# Altium PCB TD3_TP2_Placa-de-desarrollo.PcbDoc
Units mm, origin at the board's own origin, x right, y up, seen from the top; angles counter-clockwise.
Board outline 85 x 80 mm, 2 copper layers (Top Layer, Bottom Layer); 67 components, 68 nets, 231 pads, 16 vias.
Unrouted connection lines stored in the file: 1.
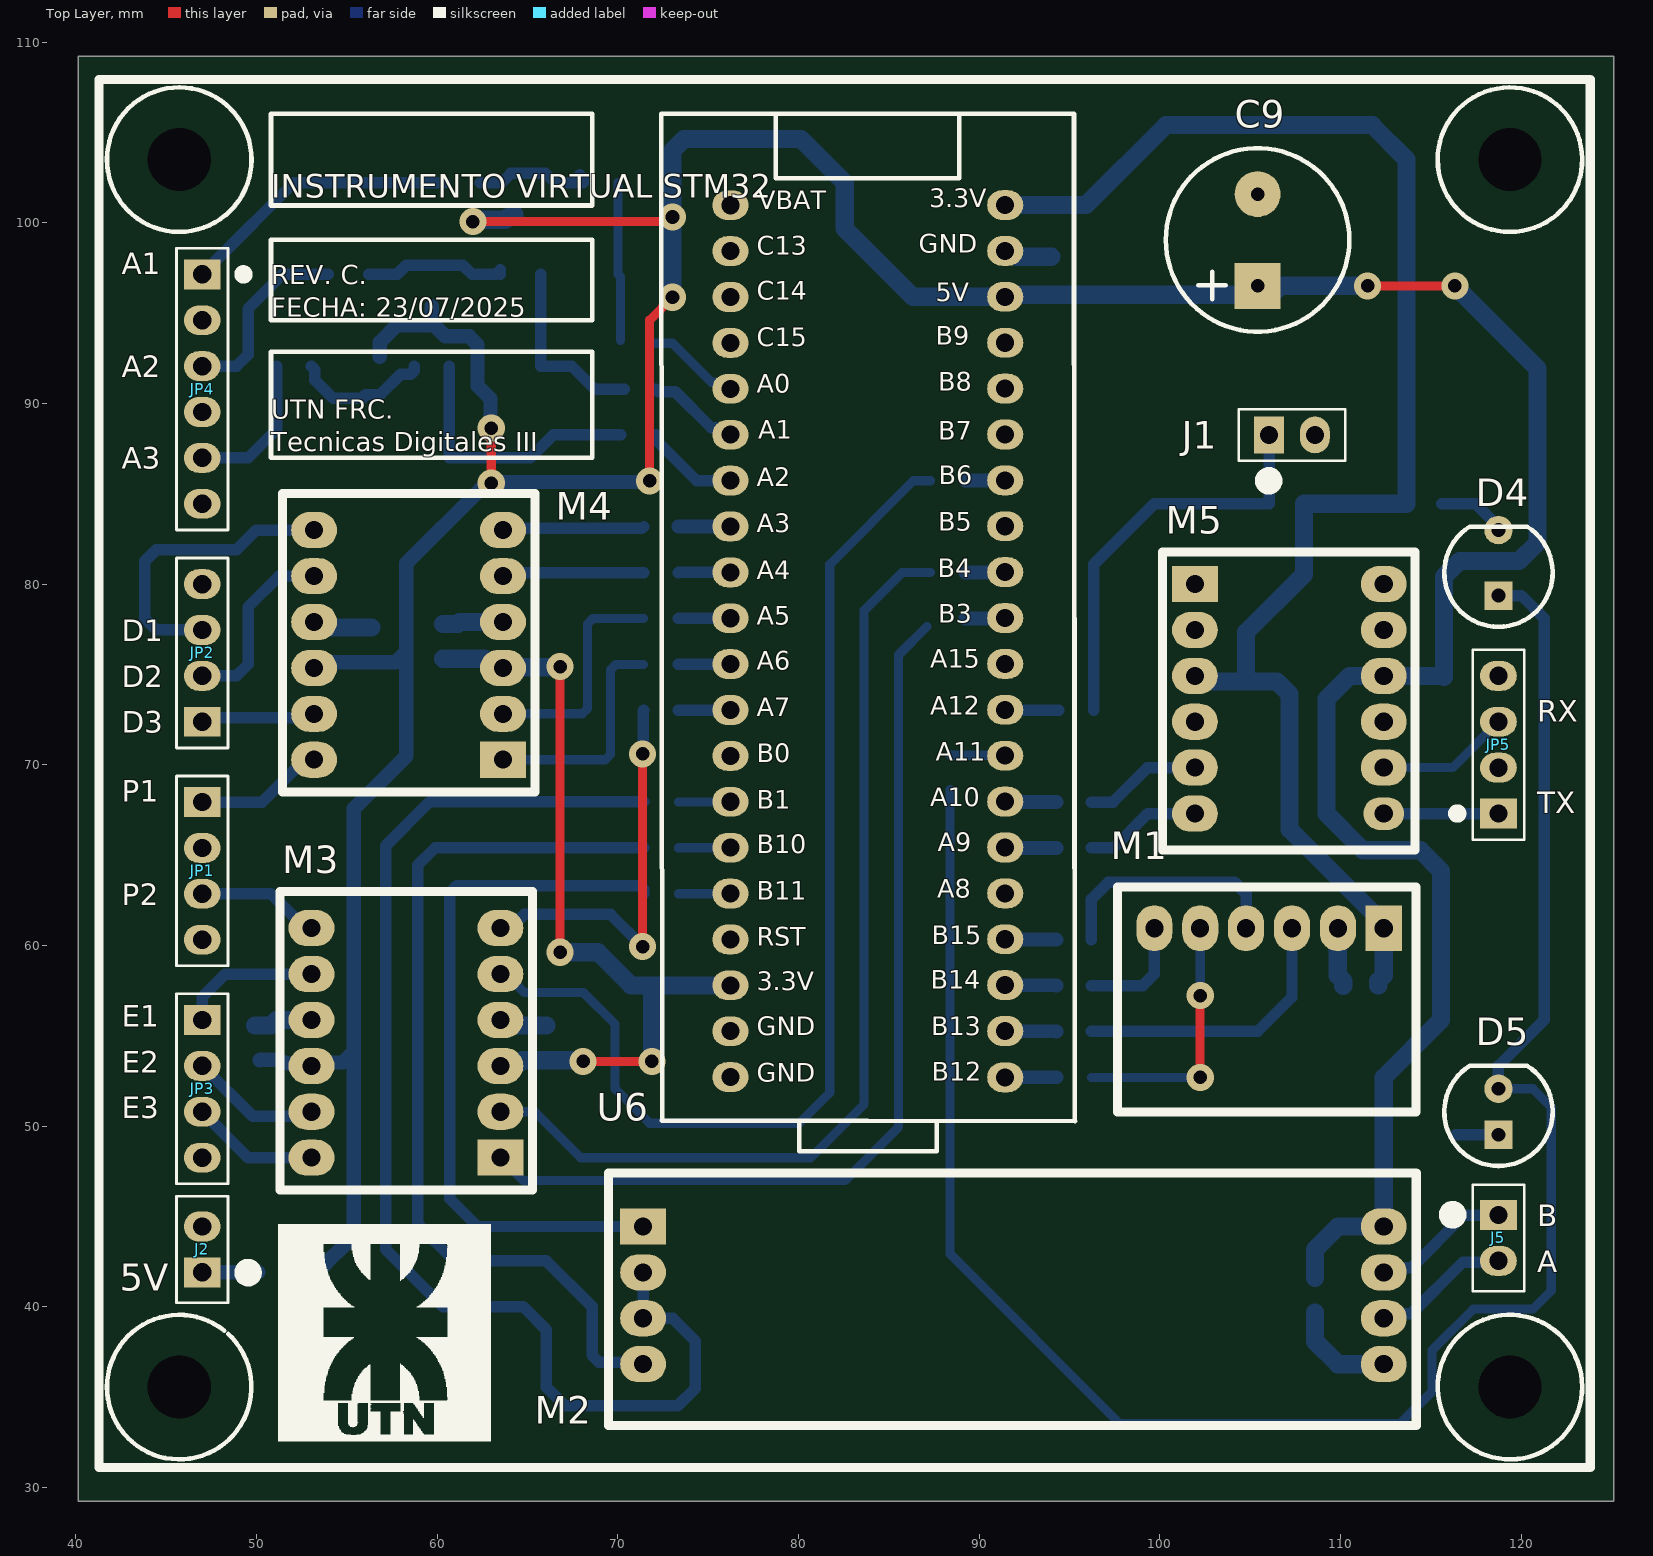
[diagram p0: Top Layer view]
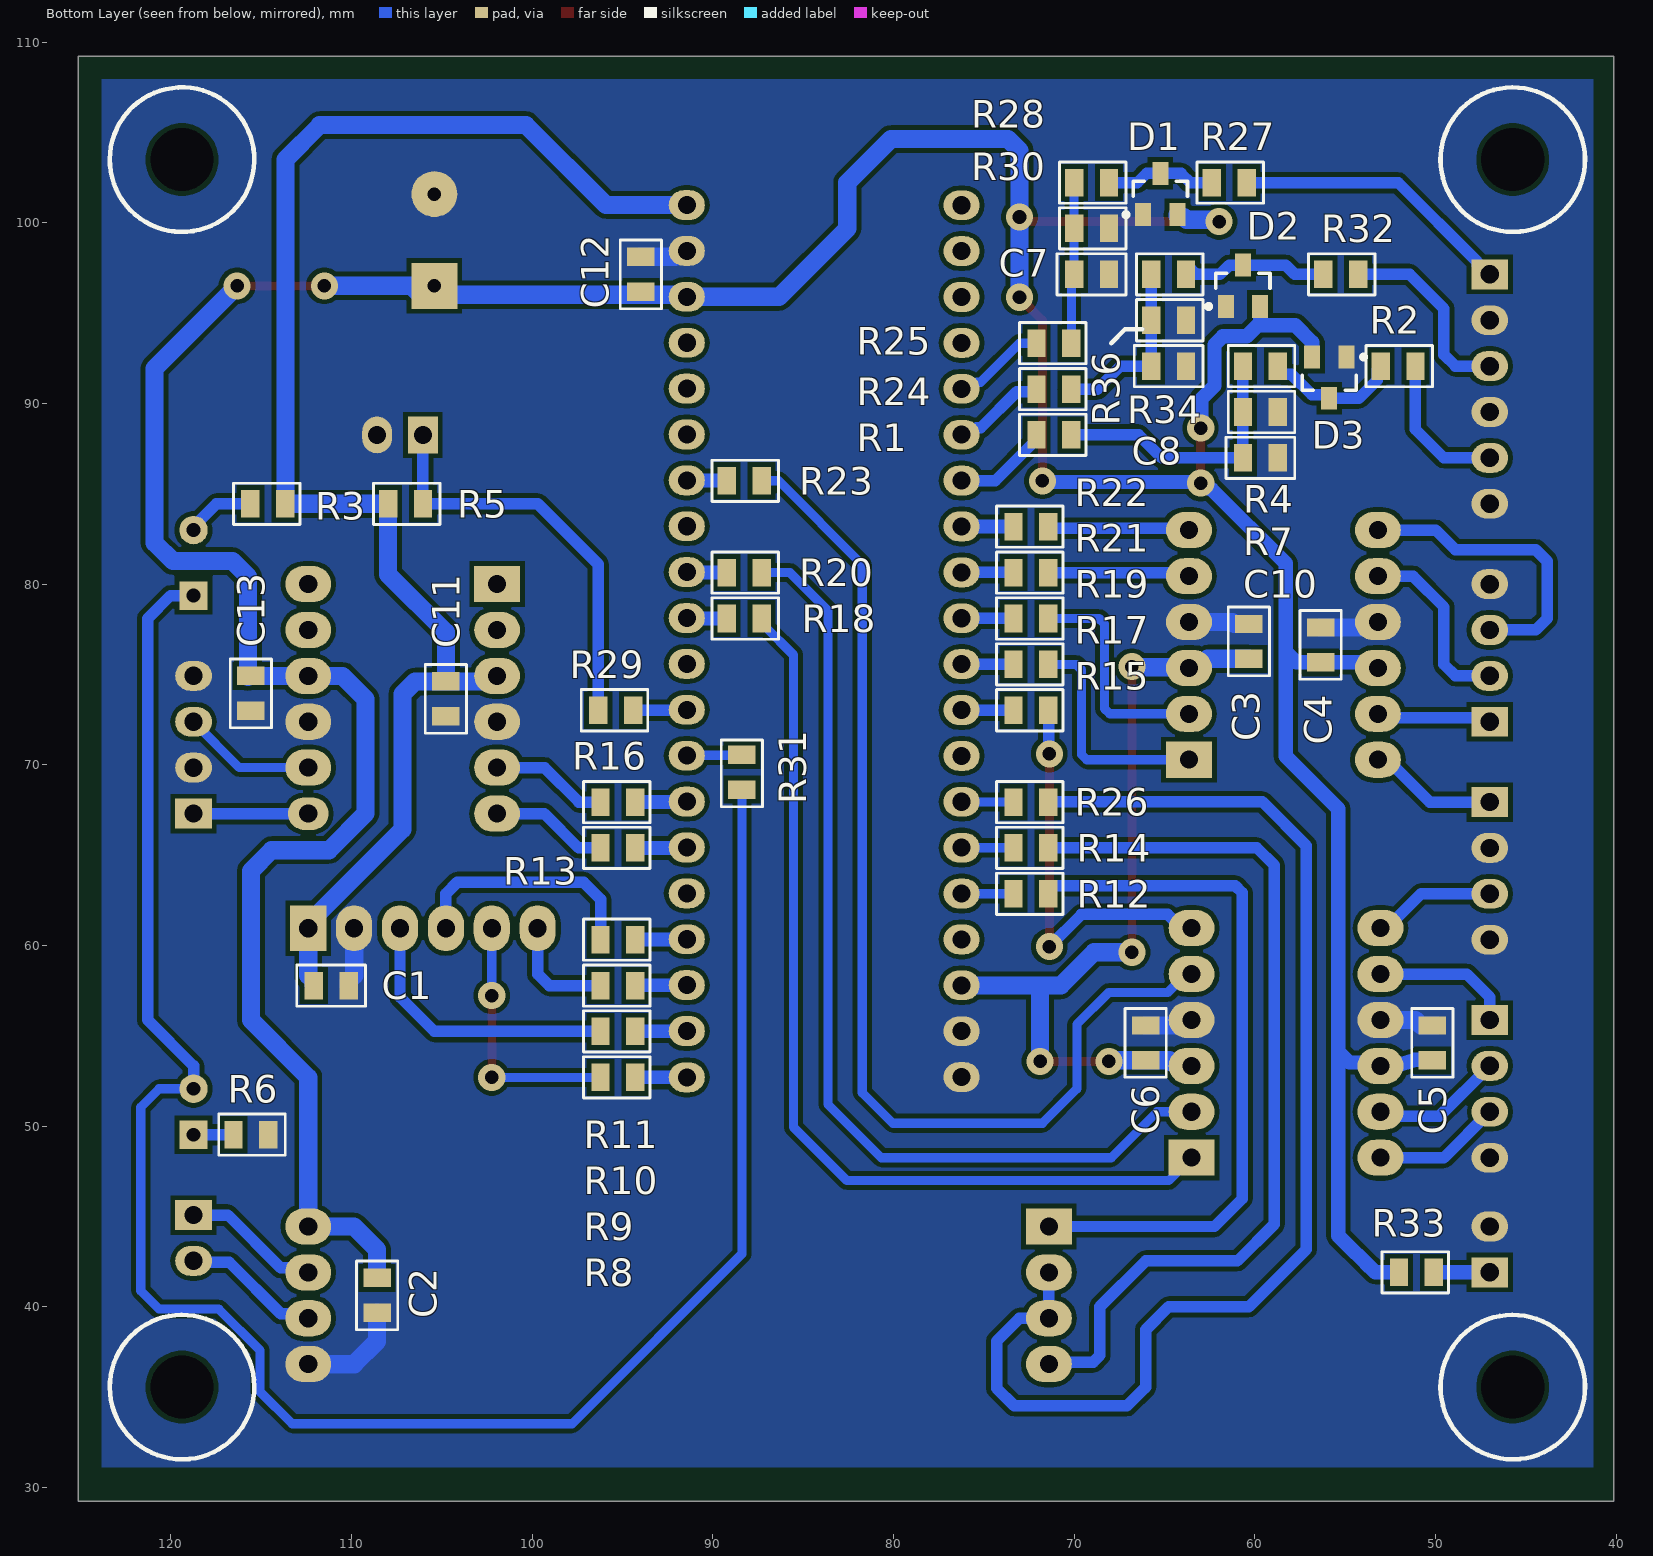
[diagram p1: Bottom Layer view, seen from below]
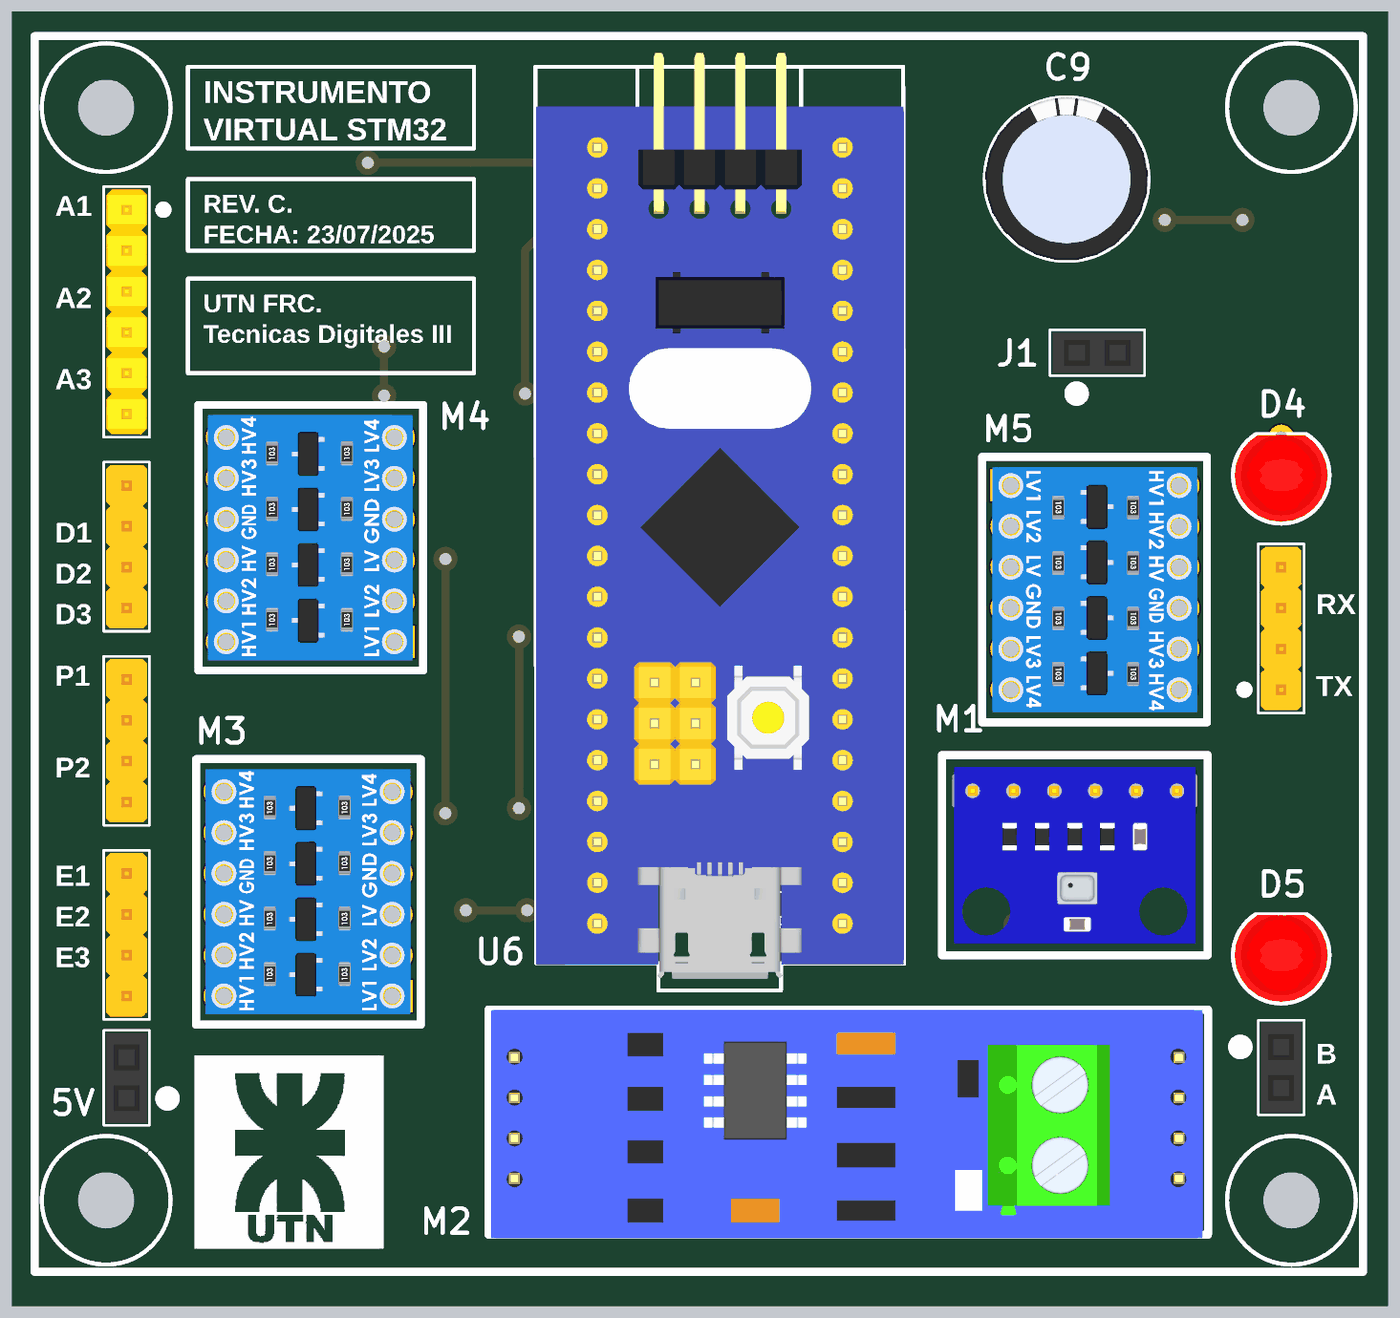
[diagram p2: 3D render of the assembled board from above, using the file's embedded part models]
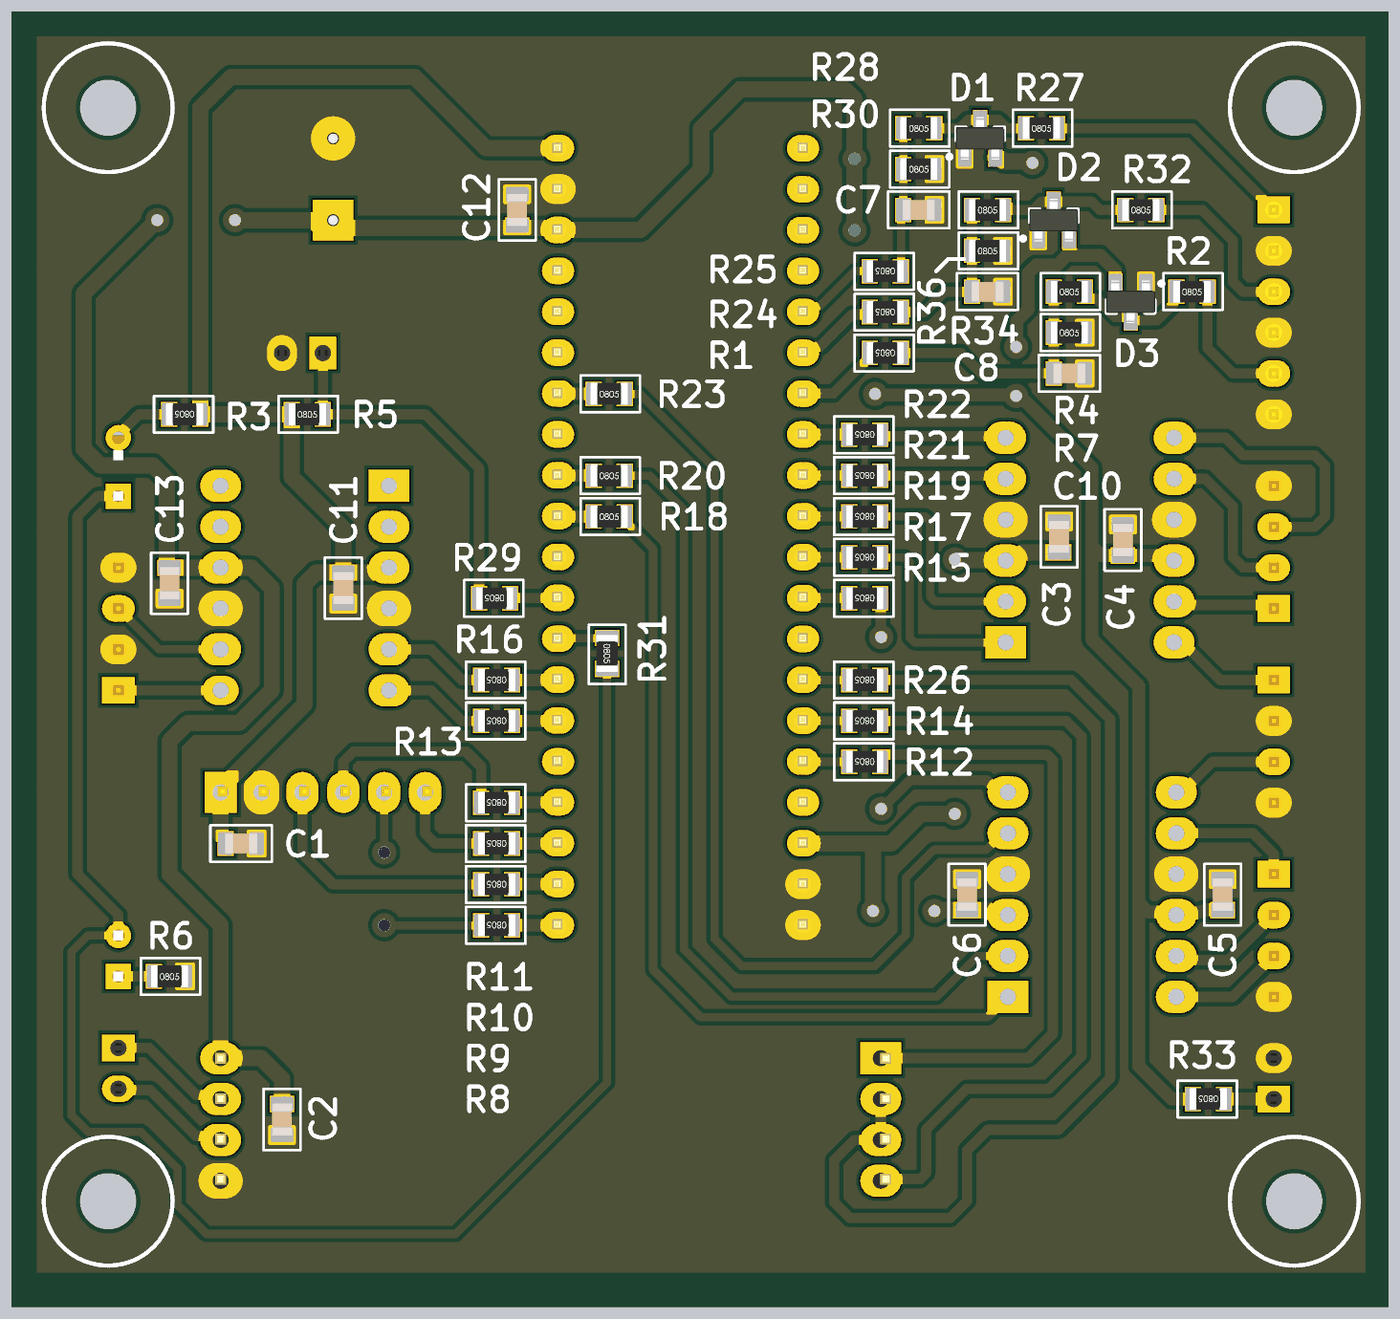
[diagram p3: 3D render of the assembled board from below, using the file's embedded part models]

## Layer stack, top to bottom
Top Solder: solder mask 0.0102, Solder Resist, Dk 3.5
Top Layer: signal copper 0.0356
Dielectric 1: dielectric 0.32, FR-4, Dk 4.8
Bottom Layer: signal copper 0.0356
Bottom Solder: solder mask 0.0102, Solder Resist, Dk 3.5

## Board outline
40.128,29.23 40.128,109.23 125.128,109.23 125.128,29.23

## Design rules (kind name [scope] priority, off if disabled: settings)
Clearance [All] p1: gap=0.254 ignorepadtopadclearanceinfootprint=FALSE
HoleSize [All] p1: absolutevalues=TRUE maxlimit=4.064 minlimit=0.025 maxpercent=80.000 minpercent=20.000
MinimumSolderMaskSliver [All] p1: minsoldermaskwidth=0.127
PolygonConnect [All] p1: connectstyle=Direct reliefconductorwidth=0.254 reliefentries=4 polygonreliefangle="90 Angle" airgapwidth=0.254
RoutingVias [All] p1: holewidth=0.711 width=1.27 viastyle="Through Hole" minholewidth=0.711 minwidth=1.27 maxholewidth=0.711 maxwidth=1.27
SilkToSilkClearance [All] p1: silktosilkclearance=0
SilkToSolderMaskClearance [IsPad] p1: minsilkscreentomaskgap=0.203 clearancetoexposedcopper=TRUE
SolderMaskExpansion [All] p1: expansion=0.102 istentingtop=FALSE
Width [All] p1: maxlimit=2.54 minlimit=0.254 preferedwidth=0.635
26 further rules are at their usual default settings.

## Components (designator, comment, footprint, x,y, rotation, side; value= is the part's Value field where it differs from the comment)
C1 "Cap No Pol" C_0805_RFW 111.125,57.785 r180 bottom
C2 "Cap No Pol" C_0805_RFW 108.585,40.64 r270 bottom
C3 "Cap No Pol" C_0805_RFW 60.325,76.835 r270 bottom
C4 "Cap No Pol" C_0805_RFW 56.359,76.645 r90 bottom
C5 "Cap No Pol" C_0805_RFW 50.165,54.61 r90 bottom
C6 "Cap No Pol" C_0805_RFW 66.04,54.61 r90 bottom
C7 "330pF" C_0805_RFW 69.037,97.155 r0 bottom
C8 "330pF" C_0805_RFW 64.77,92.075 r0 bottom
C9 "Cap Pol Al" CAP_ELECTR_V_10x12 105.41,99.06 r90 top
C10 "330pF" C_0805_RFW 59.69,86.995 r0 bottom
C11 "Cap No Pol" C_0805_RFW 104.775,73.66 r90 bottom
C12 "Cap No Pol" C_0805_RFW 93.98,97.155 r90 bottom
C13 "Cap No Pol" C_0805_RFW 115.57,73.965 r270 bottom
D1 "BAV199" SOT_23_3_1_RFW 65.227,101.6 r90 bottom
D2 "BAV199" SOT_23_3_1_RFW 60.655,96.52 r90 bottom
D3 "BAV199" SOT_23_3_1_RFW 55.88,91.44 r270 bottom
D4 "LED" LED_5mm#1 118.745,79.375 r90 top
D5 "LED" LED_5mm#2 118.745,49.53 r90 top
J1 "UART-B" HEADER_2_FEMALE_2.54 107.315,88.265 r0 top
J2 "5V" HEADER_2_FEMALE_2.54 46.99,43.18 r90 top
J5 "UART-B" HEADER_2_FEMALE_2.54 118.745,43.815 r270 top
JP1 "HEADER PART" PIN_1X4_MACHO_2.54 46.99,64.135 r270 top
JP2 "HEADER PART" PIN_1X4_MACHO_2.54 46.99,76.2 r90 top
JP3 "HEADER PART" PIN_1X4_MACHO_2.54 46.99,52.07 r270 top
JP4 "HEADER PART" PIN_1X6_MACHO_2.54 46.99,90.805 r270 top
JP5 "HEADER PART" PIN_1X4_MACHO_2.54 118.745,71.12 r90 top
M1 "BMP280_Sensor presión" BMP280 112.395,60.96 r270 top
M2 "ModBus_TTL_Converter" TTL_RS485_CONVERTER 71.395,44.45 r0 top
M3 "Level Translator" Level_Translator_FET#1 64.643,47.117 r90 top
M4 "Level Translator" Level_Translator_FET#1 64.784,69.145 r90 top
M5 "Level Translator" Level_Translator_FET#2 100.795,81.153 r270 top
R1 "100R" R_0805_RFW 71.12,88.265 r0 bottom
R2 "10k" R_0805_RFW 52.07,92.075 r180 bottom
R3 "100R0" R_0805_RFW 114.63,84.455 r0 bottom
R4 "100k" R_0805_RFW 59.69,92.075 r180 bottom
R5 "10k" R_0805_RFW 107.01,84.455 r180 bottom
R6 "100R0" R_0805_RFW 115.57,49.53 r180 bottom
R7 "15k" R_0805_RFW 59.69,89.535 r180 bottom
R8 "100R" R_0805_RFW 95.25,52.705 r0 bottom
R9 "100R" R_0805_RFW 95.25,55.245 r0 bottom
R10 "100R" R_0805_RFW 95.25,57.785 r0 bottom
R11 "100R" R_0805_RFW 95.25,60.325 r0 bottom
R12 "100R" R_0805_RFW 72.39,62.865 r0 bottom
R13 "100R" R_0805_RFW 95.25,65.405 r0 bottom
R14 "100R" R_0805_RFW 72.39,65.405 r0 bottom
R15 "100R" R_0805_RFW 72.39,73.025 r0 bottom
R16 "100R" R_0805_RFW 95.25,67.945 r0 bottom
R17 "100R" R_0805_RFW 72.39,75.565 r0 bottom
R18 "100R" R_0805_RFW 88.265,78.105 r180 bottom
R19 "100R" R_0805_RFW 72.39,78.105 r0 bottom
R20 "100R" R_0805_RFW 88.265,80.645 r180 bottom
R21 "100R" R_0805_RFW 72.39,80.645 r0 bottom
R22 "100R" R_0805_RFW 72.39,83.185 r0 bottom
R23 "100R" R_0805_RFW 88.265,85.725 r180 bottom
R24 "100R" R_0805_RFW 71.12,90.805 r0 bottom
R25 "100R" R_0805_RFW 71.12,93.345 r0 bottom
R26 "100R" R_0805_RFW 72.39,67.945 r0 bottom
R27 "10k" R_0805_RFW 61.417,102.235 r180 bottom
R28 "100k" R_0805_RFW 69.037,102.235 r180 bottom
R29 "100R" R_0805_RFW 95.377,73.025 r0 bottom
R30 "15k" R_0805_RFW 69.037,99.695 r180 bottom
R31 "100R" R_0805_RFW 88.392,69.596 r270 bottom
R32 "10k" R_0805_RFW 55.245,97.155 r180 bottom
R33 "100R" R_0805_RFW 51.054,41.91 r0 bottom
R34 "100k" R_0805_RFW 64.77,97.155 r180 bottom
R36 "15k" R_0805_RFW 64.77,94.615 r180 bottom
U6 "BluePill_STM32F103C8TX" BluePill_STM32F103CTX 91.44,52.705 r0 top

## Footprints (in the part's own frame and the unit in brackets; to place one, negate y for a bottom-side part, rotate by r counter-clockwise, add the part's x,y. Pads: shape width x height; smd on the part's side, far side on the other; paste and mask are expansions set on the pad)
BluePill_STM32F103CTX [mm]
  oval 2x1.651 hole 1: 1(0,0) 2(0,2.565) 3(0,5.105) 4(0,7.645) 5(0,10.185) 6(0,12.725) 7(0,15.265) 8(0,17.805) 9(0,20.345) 10(0,22.885) 11(0,25.425) 12(0,27.965) 13(0,30.505) 14(0,33.045) 15(0,35.585) 16(0,38.125) 17(0,40.665) 18(0,43.205) 19(0,45.745) 20(0,48.285) 21(-15.215,48.275) 22(-15.215,45.735) 23(-15.215,43.195) 24(-15.215,40.655) 25(-15.215,38.115) 26(-15.215,35.575) 27(-15.215,33.035) 28(-15.215,30.495) 29(-15.215,27.955) 30(-15.215,25.415) 31(-15.215,22.875) 32(-15.215,20.335) 33(-15.215,17.795) 34(-15.215,15.255) 35(-15.215,12.715) 36(-15.215,10.175) 37(-15.215,7.635) 38(-15.215,5.095) 39(-15.215,2.555) 40(-15.215,0.015)
  silkscreen extent -19.05,-4.09 3.87,53.34, body extent -19,-3.37 3.86,54.19, height 12.31
BMP280 [mm] "Sensor de presión y temperatura BMP280"
  rect 2.54x2 hole 1: 1(0,0)
  oval 2.54x2 hole 1: 2(0,-2.54) 3(0,-5.08) 4(0,-7.62) 5(0,-10.16) 6(0,-12.7)
  silkscreen extent -2.29,-14.73 10.16,1.78, body extent -1.56,-14.1 9.44,1.14, height 6.27
C_0805_RFW [mil] "CAPACITOR SMD 0805 - ALTURA 0.9mm"
  rect 40x60 smd paste-50: 1(-38,0) 2(38,0)
  silkscreen extent -75,-45 75,45, body extent -39,-25 39,25, height 24
CAP_ELECTR_V_10x12 [mm] "CAPACITOR ELECTROLITICO 10x12mm PITCH 200mils - VERTICAL"
  rect 2.54x2.54 hole 0.75: 1(-2.54,0)
  round 2.54 hole 0.75: 2(2.54,0)
  silkscreen extent -5.08,-5.08 5.08,5.08, body extent -5.08,-5.08 5.08,5.08, height 13.11
HEADER_2_FEMALE_2.54 [mil] "HEADER 2 PINES HEMBRA - PITCH 2.54mm - ALTURA 8.5mm"
  rect 65x80 hole 40: 1(-50,0)
  oval 65x80 hole 40: 2(50,0)
  silkscreen extent -116,-115 116,56, body extent -110,-50 110,50, height 335
LED_5mm#1 [mil] "LED 5mm - ROJO"
  round 62 hole 30: A(142.72,0)
  rect 62x62 hole 30: K(0,0)
  silkscreen extent -68,-118 150,118, body extent -64,-114 148,114, height 343
LED_5mm#2 [mil] "LED 5mm - ROJO"
  round 62 hole 30: A(100,0)
  rect 62x62 hole 30: K(0,0)
  silkscreen extent -68,-118 150,118, body extent -64,-114 148,114, height 343
Level_Translator_FET#1 [mm] "Conversor de nivel transistorizado"
  rect 2x2.54 hole 1: 1(1.143,1.143)
  oval 2x2.54 hole 1: 2(3.683,1.143) 3(6.223,1.143) 4(8.763,1.143) 5(11.303,1.143) 6(13.85,1.143) 7(13.85,11.6) 8(11.303,11.6) 9(8.763,11.6) 10(6.223,11.6) 11(3.683,11.6) 12(1.143,11.6)
  silkscreen extent -0.64,-0.64 15.88,13.33, body extent 0,0 15.25,12.75, height 2.35
Level_Translator_FET#2 [mm] "Conversor de nivel transistorizado"
  rect 2x2.54 hole 1: 1(1.143,1.143)
  oval 2x2.54 hole 1: 2(3.683,1.143) 3(6.223,1.143) 4(8.763,1.143) 5(11.303,1.143) 6(13.85,1.143) 8(11.303,11.6) 9(8.763,11.6) 10(6.223,11.6) 11(3.683,11.6) 12(1.143,11.6)
  oval 1.8x2.25 hole 1: 7(13.85,11.6)
  silkscreen extent -0.64,-0.64 15.88,13.34, body extent 0,0 15.25,12.75, height 2.35
PIN_1X4_MACHO_2.54 [mil] "PIN 1x4 MACHO - RECTO - PITCH 2.54mm"
  rect 65x80 hole 40: 1(-150,0)
  oval 65x80 hole 40: 2(-50,0) 3(50,0) 4(150,0)
  silkscreen extent -207,-56 207,56, body extent -200,-50 200,50, height 350
PIN_1X6_MACHO_2.54 [mil] "PIN 1x6 MACHO - RECTO - PITCH 2.54mm"
  rect 65x80 hole 40: 1(-250,0)
  oval 65x80 hole 40: 2(-150,0) 3(-50,0) 4(50,0) 5(150,0) 6(250,0)
  silkscreen extent -307,-56 307,100, body extent -300,-50 300,50, height 374
R_0805_RFW [mil] "RESISTENCIA SMD 0805 - ALTURA 0.55mm"
  rect 40x60 smd paste-50: 1(-38,0) 2(38,0)
  silkscreen extent -70,-45 75,45, body extent -45,-27 45,27, height 30
SOT_23_3_1_RFW [mil] "SOT 23 - 3 PINES - ALTURA 1.12mm - 50 MILS ENCAPSULADO"
  rect 50x35 smd paste-50: 1(-45,37.4) 2(-45,-37.4) 3(45,0)
  silkscreen extent -50,-59 28,80, body extent -52,-60 52,60, height 44
TTL_RS485_CONVERTER [mm] "Conversor TTL RS485 con MAX485"
  rect 2.54x2 hole 1: 1(0,0)
  oval 2.54x2 hole 1: 2(0,-2.54) 3(0,-5.08) 4(0,-7.62) 5(41,-7.62) 6(41,-5.08) 7(41,-2.54) 8(41,0)
  silkscreen extent -1.91,-11.03 42.8,2.97, body extent -1.73,-11.25 42.48,2.95, height 15.26

## Part data
C1 C2 C3 C4 C5 C6 C7 C8 C10 C11 C12 C13: library part "CAPACITOR NP", COMPONENTE=CAPACITOR
  C1 C2 C3 C5 C6 C11 C12: TENSION=50V, VALOR=100nF
  C4 C13: TENSION=50V
C9: library part "CAP POL", CAPACIDAD=100uF, DIELECTRICO=Al, COMPONENTE="Capacitor Electrolítico", MONTAJE=INS, TENSION=25V
D1 D2 D3: library part BAV99, "Par de Diodos Serie", CLASE=1, CODIGO=3401, DESCRIPCION="Low leakage switching diodes, BAV199 serie 70V 250mW sot-23 smd", ENCAPSULADO=SMD, VERSION=0
J1 J2 J5: library part CONN_2, "CONECTOR SMD 2 PINES", COMPONENTE=CONECTOR, MONTAJE=SMD
JP1 JP2 JP3 JP5: library part "PART HEADER 4", "HEADER PART 4"
JP4: library part "PART HEADER 6", "HEADER PART 6"
M3 M4 M5: library part Level_Translator_FET, "Conversor de nivel JFET"
R1 R8 R9 R10 R11 R12 R13 R14 R15 R16 R17 R18 R19 R20 R21 R22 R23 R24 R25 R26 R29 R31 R33: library part RESISTOR, COMPONENTE=RESISTOR
R2 R3 R4 R5 R6 R7 R27 R28 R30 R32 R34 R36: library part RESISTOR, TOLERANCIA=1%, COMPONENTE=RESISTOR
U6: "Placa de desarrollo BluePill"

## Free pads (board coordinates)
  round 0 hole 3.5 unplated: 0(45.72,35.56) 0(45.72,103.505) 0(119.38,35.56) 0(119.38,103.505)

## Via types
v1: diameter 1.5, hole 0.75, Top Layer to Bottom Layer, 16 vias

## Nets (pads, with @x,y where several pads share a name; then routed paths per layer and width w, separated by ;. In a path a pad name is that pad's centre, name@x,y a point inside that pad or via, vN(x,y) a via of type N, cw(c..) or ccw(c..) an arc to the next point about the centre after c; other vN are vias at no path point)
+3V3: C1.1 C3.2 C6.1 C11.2 M1.1 M3.3 M4.3 M5.3 R3.1 R5.1 U6.20 U6.38 | length 130.2
  Top Layer w0.5: v1(66.802,59.63) v1(66.802,75.438) ; v1(68.072,53.594) v1(71.882,53.594)
  Bottom Layer w1: v1(66.802,59.63) 68.894,59.63 70.739,57.785 71.755,57.785 71.882,57.785 ; v1(71.882,53.594) 71.882,57.785 ; U6.38@76.035,57.742 75.992,57.785 71.882,57.785 ; U6.20 95.91,100.99 100.33,105.41 111.76,105.41 113.665,103.505 R3.1 R5.1 107.975,80.543 104.775,77.343 C11.2 ; M5.3 102.474,74.93 102.779,74.625 C11.2 ; C1.1 112.09,58.039 112.395,58.344 112.395,61.23 111.895,61.73 107.188,66.437 107.188,73.914 106.477,74.625 C11.2
  Bottom Layer w1.016: C3.2 62.602,75.87 63.104,75.368 M4.3 63.676,75.403 66.767,75.403 v1(66.802,75.438) ; M3.3@63.383,53.457 M3.3 63.688,53.528 64.601,53.528 64.718,53.645 68.021,53.645 v1(68.072,53.594)
+5: C2.1 C4.1 C5.1 C9.1 C12.1 C13.1 D1.2 D2.2 D3.2 M2.8 M3.10 M4.10 M5.10 R33.2 U6.18 | length 243.1
  Top Layer w0.5: v1(61.976,100.076) 72.702,100.076 72.956,100.33 v1(73.025,100.33) ; v1(62.992,85.598) v1(62.992,88.646) ; v1(71.755,85.725) 71.755,94.615 v1(73.025,95.885) ; v1(111.506,96.52) v1(116.332,96.52)
  Bottom Layer w0.8: C5.1 50.213,53.67 51.156,53.67 52.229,53.34 M3.10 53.231,53.528 54.777,53.528 55.372,54.123 ; R33.2 53.34,41.91 ; M4.10 53.72,75.368 54.032,75.68 C4.1 57.698,75.68 58.293,76.275 ; 53.848,42.418 53.34,41.91 ; D3.2 56.83,93.406 57.764,94.34 59.705,94.34 D2.2 ; 59.75,94.428 60.452,93.726 61.761,93.726 62.23,93.257 62.23,90.996 62.95,90.276 62.95,88.688 v1(62.992,88.646) ; v1(62.992,85.598) 62.803,85.598 62.453,85.248 62.388,85.248 58.293,81.153 58.293,76.275 ; v1@63.055,85.661 71.691,85.661 v1(71.755,85.725) ; 53.34,41.91 55.372,43.942 55.372,54.123 ; 55.372,54.123 55.372,67.564 58.293,70.485 58.293,76.275
  Bottom Layer w1: C2.1 108.585,43.18 109.855,44.45 M2.8 112.395,52.705 115.57,55.88 115.57,64.135 114.427,65.278 111.252,65.278 109.22,67.31 109.22,73.66 110.49,74.93 M5.10 C13.1 115.687,74.93 115.738,74.879 115.738,80.432 116.586,81.28 119.888,81.28 120.904,82.296 120.904,91.948 v1(116.332,96.52)
  Bottom Layer w1.016: v1(61.976,100.076) 62.069,100.169 63.775,100.169 63.936,100.33 64.214,100.33 64.277,100.393 D1.2 ; v1(73.025,95.885) v1(73.025,100.33) 73.025,104.013 73.66,104.648 80.137,104.648 82.55,102.235 82.55,99.695 86.335,95.91 91.415,95.91 91.44,95.885 U6.18 91.562,96.032 106.192,96.032 106.68,96.52 v1(111.506,96.52) ; C9.1 C9.1@105.664,96.266
DIN_01: JP3.1 M3.8 | length 7.8
  Bottom Layer w0.635: JP3.1 46.99,57.15 48.26,58.42 M3.8
DIN_02: JP3.2 M3.11 | length 7.3
  Bottom Layer w0.635: JP3.2 49.784,50.546 52.789,50.546 M3.11
DIN_03: JP3.3 M3.12 | length 7.1
  Bottom Layer w0.635: JP3.3 49.53,48.26 M3.12
DOUT-01: JP2.3 M4.7 | length 16.7
  Bottom Layer w0.635: JP2.3 44.45,77.47 43.815,78.105 43.815,81.28 44.45,81.915 48.895,81.915 49.975,82.995 M4.7
DOUT-02: JP2.2 M4.8 | length 10.3
  Bottom Layer w0.635: JP2.2 48.895,74.93 49.53,75.565 49.53,78.74 51.238,80.448 M4.8
DOUT-03: JP2.1 M4.11 | length 6.4
  Bottom Layer w0.635: JP2.1 47.209,72.609 52.965,72.609 M4.11
GND: C1.2 C2.2 C3.1 C4.2 C5.2 C6.2 C7.1 C8.1 C9.2 C10.1 C11.1 C12.2 C13.2 D1.1 D2.1 D3.1 J1.2 J2.2 JP1.2 JP1.4 JP2.4 JP3.4 JP4.2 JP4.4 JP4.6 JP5.2 JP5.4 M1.2 M2.5 M3.4 M3.9 M4.4 M4.9 M5.4 M5.9 R6.2 R7.2 R30.2 R36.2 U6.19 U6.39 U6.40 | length 24.5
  Bottom Layer w1.016: C5.2@49.911,55.575 50.8,55.575 51.105,55.88 M3.9 ; M4.9 53.72,77.908 54.018,77.61 C4.2 ; C3.1 61.145,77.8 61.253,77.908 M4.4 ; M3.4 64.036,55.88 64.341,55.575 C6.2 ; U6.19 91.786,98.45 92.117,98.12 C12.2 ; C2.2 108.585,38.1 109.855,36.83 M2.5 ; M1.2 109.855,58.344 110.16,58.039 C1.2
  Bottom Layer w1.524: M4.9 M4.9@53.184,77.915
NetD1_3: D1.3 R27.1 R28.2 | length 6.9
  Bottom Layer w0.635: R27.1 63.572,102.235 64.08,102.743 D1.3 65.989,102.743 66.497,102.235 67.882,102.235 67.882,102.679 68.072,102.489 R28.2
NetD2_3: D2.3 R32.1 R34.2 | length 8.1
  Bottom Layer w0.635: R32.1 57.785,97.155 58.293,97.663 61.417,97.663 61.925,97.155 63.246,97.155 63.5,97.409 R34.2@63.5,97.155
NetD3_3: D3.3 R2.1 R4.2 | length 7.7
  Bottom Layer w0.635: R2.1 53.226,91.884 53.226,91.305 54.234,90.297 D3.3 55.88,90.367 56.007,90.494 56.839,90.494 57.975,91.63 58.534,91.63 58.725,91.821 R4.2
NetD4_A: D4.A R3.2 | length 3.9
  Bottom Layer w0.635: R3.2 117.475,84.455 118.745,83.185 D4.A
NetD5_K: D5.K R6.1 | length 2.4
  Bottom Layer w0.635: R6.1@116.385,49.53 D5.K
NetJ2_1: J2.1 R33.1 | length 3.1
  Bottom Layer w0.8: J2.1 R33.1
NetJ5_1: J5.1 M2.7 | length 7.7
  Bottom Layer w0.635: M2.7 112.641,42.156 113.911,42.156 116.84,45.085 J5.1
NetJ5_2: J5.2 M2.6 | length 8.2
  Bottom Layer w0.635: M2.6 112.641,39.616 113.911,39.616 116.758,42.463 J5.2@119.282,42.463
NetJP4_1: JP4.1 R27.2 | length 15.7
  Bottom Layer w0.635: JP4.1 47.18,97.155 47.688,97.663 47.688,97.853 52.07,102.235 R27.2
NetJP4_3: JP4.3 R32.2 | length 10.6
  Bottom Layer w0.635: JP4.3 48.895,92.075 49.53,92.71 49.53,95.25 51.435,97.155 R32.2@53.975,97.155
NetJP4_5: JP4.5 R2.2 | length 8.3
  Bottom Layer w0.635: JP4.5 49.53,86.995 51.105,88.57 R2.2
NetR1_2: R1.2 U6.27 | length 5.3
  Bottom Layer w0.635: R1.2 72.085,88.011 74.357,85.74 U6.27
NetR8_1: R8.1 U6.1 | length 2.8
  Bottom Layer w0.762: U6.1 R8.1
NetR9_1: R9.1 U6.2 | length 2.9
  Bottom Layer w0.508: U6.2@91.44,55.245 U6.2
  Bottom Layer w0.762: U6.2@91.44,55.245 91.453,55.258 94.272,55.258 R9.1
NetR10_1: R10.1 U6.3 | length 2.9
  Bottom Layer w0.762: U6.3 91.453,57.798 94.272,57.798 R10.1
NetR11_1: R11.1 U6.4 | length 3
  Bottom Layer w0.508: U6.4@91.344,60.37 91.364,60.35 U6.4
  Bottom Layer w0.762: U6.4 91.453,60.338 94.272,60.338 R11.1
NetR12_2: R12.2 U6.36 | length 2.9
  Bottom Layer w0.508: R12.2 76.2,62.865 76.211,62.865 U6.36
  Bottom Layer w0.635: U6.36@76.2,62.865 76.215,62.88 U6.36
NetR13_1: R13.1 U6.6 | length 2.8
  Bottom Layer w0.762: U6.6@91.465,65.405 R13.1
NetR14_2: R14.2 U6.35 | length 2.9
  Bottom Layer w0.508: R14.2 73.37,65.42 76.215,65.42 U6.35
  Bottom Layer w0.635: U6.35@76.2,65.405 U6.35@76.215,65.42
NetR15_2: R15.2 U6.32 | length 2.9
  Bottom Layer w0.635: R15.2 73.362,73.032 76.218,73.032 U6.32
NetR16_1: R16.1 U6.7 | length 2.8
  Bottom Layer w0.762: U6.7@91.44,67.945 R16.1
NetR17_2: R17.2 U6.31 | length 2.9
  Bottom Layer w0.635: R17.2 73.362,75.572 76.218,75.572 U6.31
NetR18_1: R18.1 U6.11 | length 2.2
  Bottom Layer w0.762: R18.1 90.805,78.105 91.415,78.105 U6.11
NetR19_2: R19.2 U6.30 | length 2.9
  Bottom Layer w0.635: R19.2 73.362,78.112 76.218,78.112 U6.30
NetR20_1: R20.1 U6.12 | length 2.2
  Bottom Layer w0.762: R20.1 89.243,80.658 91.427,80.658 U6.12
NetR21_2: R21.2 U6.29 | length 2.9
  Bottom Layer w0.635: R21.2 73.362,80.652 76.218,80.652 U6.29
NetR22_2: R22.2 U6.28 | length 2.9
  Bottom Layer w0.762: R22.2 73.362,83.192 76.218,83.192 U6.28
NetR23_1: R23.1 U6.14 | length 2.2
  Bottom Layer w0.762: R23.1 89.243,85.738 91.427,85.738 U6.14
NetR24_2: R24.2 U6.26 | length 5.2
  Bottom Layer w0.635: R24.2 72.234,90.656 73.174,90.656 75.178,88.652 75.404,88.652 75.776,88.28 U6.26
NetR25_2: R25.2 U6.25 | length 5.2
  Bottom Layer w0.508: R25.2 73.025,93.345 75.186,91.184 75.377,91.184 75.742,90.82 U6.25
NetR26_2: R26.2 U6.34 | length 2.9
  Bottom Layer w0.508: R26.2 76.211,67.945 U6.34
NetR29_1: R29.1 U6.9 | length 3
  Bottom Layer w0.635: U6.9 91.44,73.025 91.453,73.038 94.399,73.038 R29.1
NetR31_1: R31.1 U6.8 | length 3.1
  Bottom Layer w0.508: R31.1 88.418,70.536 91.415,70.536 U6.8
PWM_01: JP1.1 M4.12 | length 7.6
  Bottom Layer w0.635: JP1.1@46.547,67.945 50.314,67.945 52.657,70.288 M4.12
PWM_02: JP1.3 M3.7 | length 6.8
  Bottom Layer w0.635: JP1.3 50.8,62.865 52.698,60.967 M3.7
RS485_SEL: J1.1 R5.2 R29.2 | length 23.2
  Bottom Layer w0.635: R29.2 96.342,81.102 99.695,84.455 R5.2 J1.1 J1.1@106.197,88.113
UART_MON: D4.K D5.A R31.2 | length 110.9
  Bottom Layer w0.508: R31.2 88.392,42.926 97.79,33.528 113.284,33.528 115.062,35.306 115.062,37.592 117.348,39.878 120.65,39.878 121.666,40.894 121.666,51.054 120.65,52.07 D5.A
  Bottom Layer w0.635: D5.A 118.745,53.34 121.285,55.88 121.285,78.105 120.015,79.375 D4.K
UART_RX: JP5.3 M5.8 | length 7.4
  Bottom Layer w0.508: M5.8 116.205,69.85 JP5.3
UART_TX: JP5.1 M5.7 | length 6.4
  Bottom Layer w0.635: M5.7 112.395,67.31 112.399,67.306 118.741,67.306 JP5.1
uC_ADC_AN-01: C7.2 R25.1 R28.1 R30.1 | length 8.8
  Bottom Layer w0.508: R28.1 R30.1 C7.2 70.142,97.015 R25.1@70.142,93.51
uC_ADC_AN-02: C8.2 R24.1 R34.1 R36.1 | length 10.2
  Bottom Layer w0.635: R34.1 R36.1 C8.2 67.437,92.075 68.707,90.805 R24.1@70.345,90.805
uC_ADC_AN-03: C10.2 R1.1 R4.1 R7.1 | length 15.1
  Bottom Layer w0.635: R4.1 R7.1 C10.2 65.151,86.995 66.421,88.265 R1.1
uC_DIN_01: M4.6 R22.1 | length 9.1
  Top Layer w0.5: M4.6 M4.6@63.83,83.185
  Bottom Layer w0.635: M4.6@63.133,83.09 71.33,83.09 R22.1 ; M4.6@63.195,83.185 M4.6@63.29,83.09
  Bottom Layer w1.016: M4.6@63.29,83.09 63.385,82.995 M4.6
uC_DIN_02: M4.5 R21.1 | length 8.4
  Bottom Layer w0.635: M4.5@63.33,80.645 R21.1 ; M4.5 M4.5@63.838,80.645
uC_DIN_03: M4.2 R19.1 | length 12.7
  Bottom Layer w0.508: M4.2 68.028,72.828 68.326,73.126 68.326,77.807 68.624,78.105 R19.1
uC_DOUT-01: M3.1 R18.2 | length 52.4
  Bottom Layer w0.508: M3.1@63.344,48.416 64.77,46.99 82.574,46.99 85.534,49.951 85.534,76.086 R18.2@87.116,77.667
uC_DOUT-02: M3.2 R20.2 | length 54.3
  Bottom Layer w0.508: M3.2 65.405,50.8 67.945,48.26 80.669,48.26 83.629,51.221 83.629,78.549 85.725,80.645 R20.2
uC_DOUT-03: M3.5 R23.2 | length 61.2
  Bottom Layer w0.508: M3.5 63.798,58.42 64.814,57.404 68.082,57.404 69.85,55.636 69.85,52.07 71.755,50.165 80.034,50.165 81.724,51.856 81.724,81.09 86.36,85.725 R23.2
uC_MODBUS_RX: M2.1 R12.1 | length 39.5
  Bottom Layer w0.635: M2.1 62.23,44.45 60.706,45.974 60.706,62.938 61.078,63.31 71.234,63.31 71.425,63.119 R12.1
uC_MODBUS_TP: M2.2 M2.3 R26.1 | length 69.3
  Bottom Layer w0.635: 66.092,35.508 66.04,35.56 ; M2.2 M2.3 73.025,39.37 74.295,38.1 74.295,35.503 73.318,34.526 67.074,34.526 66.04,35.56 ; R26.1@71.425,67.96 59.578,67.96 57.15,65.532 57.15,43.18 60.325,40.005 64.77,40.005 66.04,38.735 66.04,35.56
uC_MODBUS_TX: M2.4 R14.1 | length 50
  Bottom Layer w0.635: M2.4 71.287,36.938 68.952,36.938 68.58,37.31 68.58,40.005 66.04,42.545 64.77,42.545 60.96,42.545 58.928,44.577 58.928,64.454 59.879,65.405 R14.1
uC_PWM_01: M4.1 R17.1 | length 13.2
  Bottom Layer w0.508: M4.1@63.133,70.288 69.298,70.288 69.596,70.586 69.596,75.267 69.894,75.565 R17.1
uC_PWM_02: M3.6 R15.1 | length 22
  Top Layer w0.5: v1(71.374,59.944) v1(71.374,70.612)
  Bottom Layer w0.635: M3.6 64.069,60.967 64.824,61.722 69.596,61.722 v1(71.374,59.944) ; v1(71.374,70.612) 71.399,70.637 71.399,73 R15.1
uC_SPI-CS: M1.5 R8.2 | length 14.3
  Top Layer w0.5: v1(102.235,52.705) v1(102.235,57.23)
  Bottom Layer w0.508: R8.2 v1(102.235,52.705) ; v1(102.235,57.23) M1.5
uC_SPI-SCL: M1.3 R9.2 | length 15.7
  Bottom Layer w0.635: R9.2 96.52,55.245 105.41,55.245 107.315,57.15 M1.3
uC_SPI-SDA: M1.4 R11.2 | length 13.4
  Bottom Layer w0.635: R11.2 96.215,62.56 97.155,63.5 104.14,63.5 104.775,62.865 M1.4
uC_SPI-SDO: M1.6 R10.2 | length 6.3
  Bottom Layer w0.635: R10.2 99.06,57.785 99.695,58.42 M1.6
uC_UART_RX: M5.5 R16.2 | length 7
  Bottom Layer w0.635: R16.2 97.409,67.945 99.314,69.85 M5.5@102.471,69.85
uC_UART_TX: M5.6 R13.2 | length 7.2
  Bottom Layer w0.635: R13.2 97.43,65.405 99.335,67.31 M5.6@102.622,67.31
pads on no net: M5.1 M5.2 M5.11 M5.12 U6.5 U6.10 U6.13 U6.15 U6.16 U6.17 U6.21 U6.22 U6.23 U6.24 U6.33 U6.37

## Polygon pours and split planes (outlines as drawn)
GND on Bottom Layer "NONET_L-01_P-001" (solid, pour order 0): 41.275,107.95 123.825,107.95 123.825,31.115 41.275,31.115

## Silkscreen, mask and mechanical layers (free items; w line width, h text height)
Top Overlay:
  region: 5 vertices and 4 holes, not listed, extent 51.21,32.551 62.959,44.58
  lines w0.254: 45.695,99.505 cw(c45.72,103.505) 45.72,99.505 ; 48.219,38.683 ccw(c45.72,35.56) 48.434,38.499 ; 121.379,100.04 cw(c119.38,103.505) 121.438,100.075 ; 122.094,38.499 ccw(c119.38,35.56) 122.208,38.388 ; 50.8,86.995 68.58,86.995 68.58,92.871 50.8,92.871 50.8,86.995 ; 50.8,94.615 68.58,94.615 68.58,99.06 50.8,99.06 50.8,94.615 ; 50.8,100.965 68.58,100.965 68.58,106.045 50.8,106.045 50.8,100.965
  lines w0.5: 41.275,31.115 123.825,31.115 123.825,107.95 41.275,107.95 41.275,31.115
  text "INSTRUMENTO VIRTUAL STM32" at 50.8,100.95 h2.2
  text "A1" at 42.545,96.774 h2.03
  text "REV. C.  / FECHA: 23/07/2025" at 50.8,94.449 h1.8
  text "A2" at 42.545,91.059 h2.03
  text "UTN FRC.  / Tecnicas Digitales III" at 50.8,86.995 h1.8
  text "A3" at 42.545,86.003 h2.03
  text "D1" at 42.545,76.454 h2.03
  text "D2" at 42.545,73.914 h2.03
  text "RX" at 120.904,72.009 h2.03
  text "D3" at 42.545,71.397 h2.03
  text "P1" at 42.545,67.564 h2.03
  text "TX" at 120.904,66.929 h2.03
  text "P2" at 42.545,61.849 h2.03
  text "E1" at 42.545,55.118 h2.03
  text "E2" at 42.545,52.578 h2.03
  text "E3" at 42.545,50.061 h2.03
  text "B" at 120.904,44.069 h2.03
  text "A" at 120.904,41.529 h2.03
Bottom Overlay:
  lines w0.254: 45.655,31.561 cw(c45.72,35.56) 45.72,31.56 ; 45.655,99.506 cw(c45.72,103.505) 45.72,99.505 ; 66.243,94.107 67.183,94.107 67.945,93.345 ; 119.315,31.561 cw(c119.38,35.56) 119.38,31.56 ; 122.094,106.444 ccw(c119.38,103.505) 122.208,106.333
Bottom Courtyard:
  circle w0.254: c126.365,85.09 r2.1
  circle w0.254: c143.51,31.75 r2.1
  circle w0.254: c44.45,31.75 r2.1
  circle w0.254: c31.75,120.65 r2.1
  lines w0.254: 29.25,120.65 34.25,120.65 ; 31.75,118.15 31.75,123.15 ; 41.95,31.75 46.95,31.75 ; 44.45,29.25 44.45,34.25 ; 123.865,85.09 128.865,85.09 ; 126.365,82.59 126.365,87.59 ; 141.01,31.75 146.01,31.75 ; 143.51,29.25 143.51,34.25
Board Shape:
  the board outline again, w0.5
Drill Drawing:
  circle w0.254: c25.583,145.331 r0.495
  circle w0.254: c25.583,145.331 r0.825
  circle w0.254: c25.583,137.908 r0.825
  lines w0.254: 24.758,142.444 26.408,142.444 25.583,140.795 24.758,142.444 ; 24.758,148.217 26.408,148.217 26.408,149.867 24.758,149.867 24.758,148.217 ; 24.758,151.928 25.583,152.341 26.408,151.928 25.995,152.753 26.408,153.578 25.583,153.166 24.758,153.578 25.171,152.753 24.758,151.928
  lines w0.381: 23.277,135.97 151.009,135.97 ; 23.277,154.526 151.009,154.526 ; 36.927,132.259 36.927,158.237 ; 51.534,132.259 51.534,158.237 ; 79.991,132.259 79.991,158.237 ; 98.167,132.259 98.167,158.237 ; 135.281,132.259 135.281,158.237 ; 23.277,132.259 151.009,132.259 151.009,158.237 23.277,158.237 23.277,132.259
  text "Symbol" at 25.504,155.64 h1.78
  text "Count" at 38.041,155.64 h1.78
  text "Hole Size" at 52.647,155.64 h1.78
  text "Hole Type" at 81.105,155.64 h1.78
  text "Drill Layer Pair" at 99.281,155.64 h1.78
  text "Via/Pad" at 136.395,155.64 h1.78
  text "4" at 38.041,151.928 h1.48
  text "0.762mm (30.00mil)" at 52.647,151.928 h1.48
  text "Round" at 81.105,151.928 h1.48
  text "Top Layer - Bottom Layer" at 99.281,151.928 h1.48
  text "Pad" at 136.395,151.928 h1.48
  text "4" at 38.041,148.217 h1.48
  text "3.500mm (137.79mil)" at 52.647,148.217 h1.48
  text "Round" at 81.105,148.217 h1.48
  text "Top Layer - Bottom Layer" at 99.281,148.217 h1.48
  text "Pad" at 136.395,148.217 h1.48
  text "18" at 38.041,144.506 h1.48
  text "0.750mm (29.53mil)" at 52.647,144.506 h1.48
  text "Round" at 81.105,144.506 h1.48
  text "Top Layer - Bottom Layer" at 99.281,144.506 h1.48
  text "(Mixed)" at 136.395,144.506 h1.48
  text "28" at 38.041,140.795 h1.48
  text "1.016mm (40.00mil)" at 52.647,140.795 h1.48
  text "Round" at 81.105,140.795 h1.48
  text "Top Layer - Bottom Layer" at 99.281,140.795 h1.48
  text "Pad" at 136.395,140.795 h1.48
  text "90" at 38.041,137.084 h1.48
  text "1.000mm (39.37mil)" at 52.647,137.084 h1.48
  text "Round" at 81.105,137.084 h1.48
  text "Top Layer - Bottom Layer" at 99.281,137.084 h1.48
  text "Pad" at 136.395,137.084 h1.48
  text "144 Total" at 38.041,133.373 h1.48

## Dimensions
125.128,29.23 to 125.128,109.23 on Board Shape
40.128,29.23 to 125.128,29.23 on Board Shape

## Text inside footprints (layer, text, board x,y; h text height)
U6: Top Overlay "B12" at 87.361,52.159 h1.78; Top Overlay "GND" at 77.699,52.102 h1.78; Top Overlay "B13" at 87.351,54.669 h1.78; Top Overlay "GND" at 77.699,54.667 h1.78; Top Overlay "A1" at 77.769,87.694 h1.78; Top Overlay "A0" at 77.698,90.252 h1.78; Top Overlay "C14" at 77.699,95.383 h1.78; Top Overlay "C13" at 77.699,97.874 h1.78; Top Overlay "C15" at 77.699,92.818 h1.78; Top Overlay "B6" at 87.762,85.172 h1.78; Top Overlay "B4" at 87.699,80.023 h1.78; Top Overlay "B7" at 87.732,87.643 h1.78; Top Overlay "B14" at 87.33,57.239 h1.78; Top Overlay "B5" at 87.732,82.607 h1.78; Top Overlay "VBAT" at 77.771,100.393 h1.78; Top Overlay "A10" at 87.296,67.342 h1.78; Top Overlay "A12" at 87.296,72.428 h1.78; Top Overlay "A15" at 87.296,75.012 h1.78; Top Overlay "A9" at 87.698,64.852 h1.78; Top Overlay "B3" at 87.732,77.503 h1.78; Top Overlay "A11" at 87.583,69.863 h1.78; Top Overlay "A8" at 87.667,62.287 h1.78; Top Overlay "B15" at 87.361,59.722 h1.78; Top Overlay "3.3V" at 77.699,57.158 h1.78; Top Overlay "B1" at 77.699,67.221 h1.78; Top Overlay "B0" at 77.699,69.78 h1.78; Top Overlay "A7" at 77.698,72.326 h1.78; Top Overlay "A6" at 77.698,74.911 h1.78; Top Overlay "B11" at 77.699,62.166 h1.78; Top Overlay "B10" at 77.699,64.751 h1.78; Top Overlay "RST" at 77.699,59.62 h1.78; Top Overlay "A4" at 77.698,79.921 h1.78; Top Overlay "A3" at 77.698,82.507 h1.78; Top Overlay "A2" at 77.698,85.052 h1.78; Top Overlay "A5" at 77.698,77.4 h1.78; Top Overlay "GND" at 86.66,97.999 h1.78; Top Overlay "3.3V" at 87.224,100.516 h1.78; Top Overlay "B8" at 87.732,90.354 h1.78; Top Overlay "B9" at 87.605,92.894 h1.78; Top Overlay "5V" at 87.605,95.307 h1.78